# Altium PCB IMTM-Right-PCB01.PcbDoc
Units mm, origin at the board's own origin, x right, y up, seen from the top; angles counter-clockwise.
Board outline 27 x 21 mm, 3 copper layers (Top Layer, GND Layer, Bottom Layer), stack 1.49 mm thick; 9 components, 17 nets, 44 pads, 13 vias.
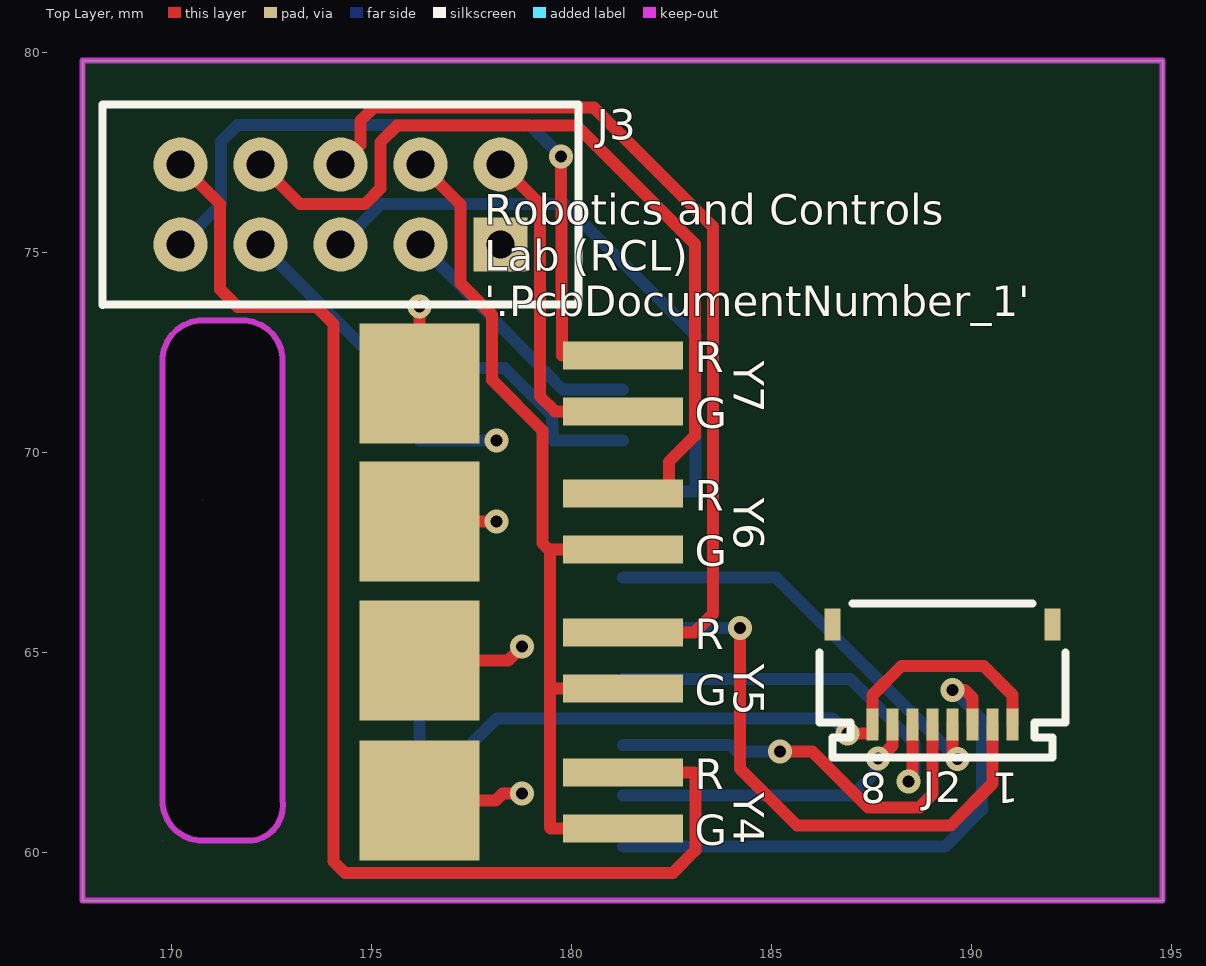
[diagram p0: Top Layer view]
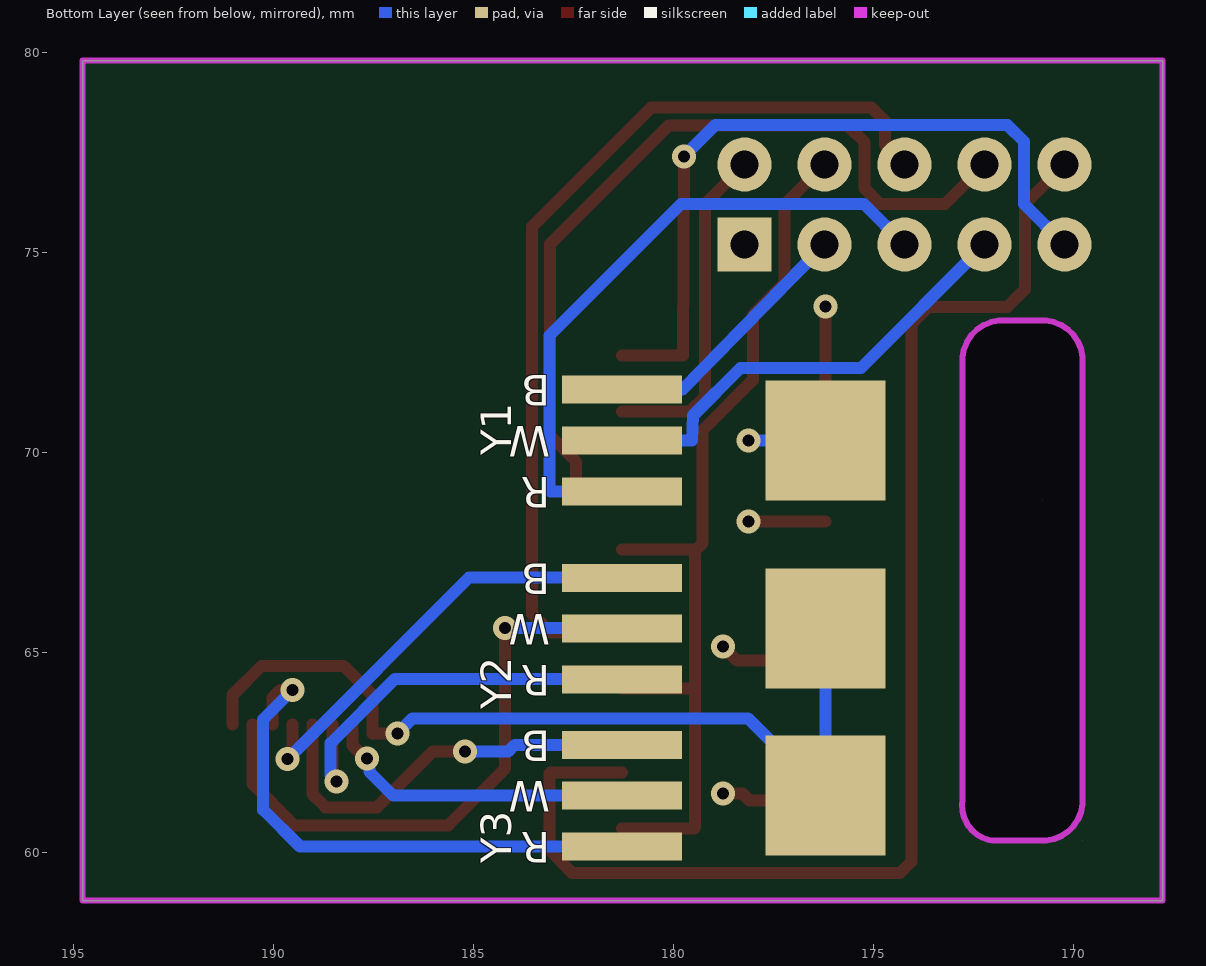
[diagram p1: Bottom Layer view, seen from below]
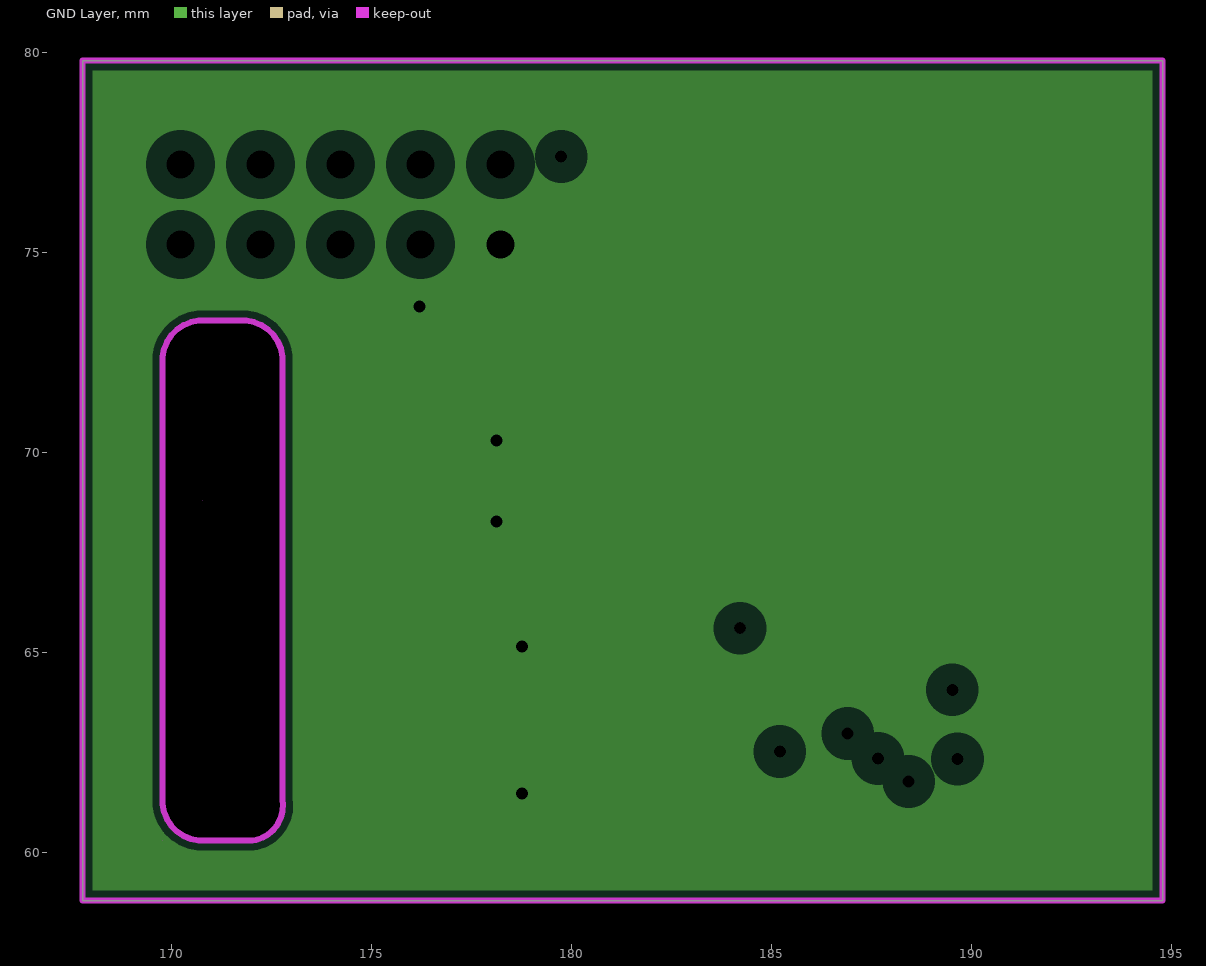
[diagram p2: GND Layer, clearances drawn from the general rule]

## Layer stack, top to bottom
Top Solder: solder mask 0.0254, SM-001, Dk 4
Top Layer: signal copper 0.035
Dielectric 1: prepreg 0.185, PP-7628, Dk 0
GND Layer: plane copper 0.035, net GND
Dielectric 2: core 1.2, Dk 0
Bottom Layer: signal copper 0.035
Bottom Solder: solder mask 0.0254, SM-001, Dk 4

## Board outline
167.767,58.801 194.767,58.801 194.767,79.801 191.767,79.801 167.767,79.801
cut-out: 169.767,61.301 169.767,72.301 cw(c170.767,72.301) 170.767,73.301 171.767,73.301 cw(c171.767,72.301) 172.767,72.301 172.767,61.301 cw(c171.892,61.176) 172.017,60.301 170.767,60.301 cw(c170.766,61.3)
cut-out: 170.767,68.801
cut-out: 169.767,71.801
cut-out: 169.767,60.301

## Design rules (kind name [scope] priority, off if disabled: settings)
Clearance [All] p1: gap=0.15 ignorepadtopadclearanceinfootprint=FALSE
ComponentClearance [All] p1: gap=0.1 collisioncheckmode=3 verticalgap=0.254 showdistances=FALSE
FabricationTestPointUsage TestPointUsage [All] p1: valid=0 allowmultiple=FALSE
FabricationTestpoint Testpoint [All] p1: side=3 testpointundercomponent=TRUE minsize=1.016 maxsize=2.54 preferedsize=1.524 minholesize=0 maxholesize=1.016 preferedholesize=0.813 testpointgrid=0.025 allowsidetop=TRUE allowsidebottom=TRUE usegrid=TRUE gridtolerance=0
PlaneClearance [All] p1: clearance=0.508
PlaneConnect [All] p1: planeconnectstyle=Relief reliefexpansion=0.254 reliefentries=4 reliefconductorwidth=0.254 reliefairgap=0.254
PolygonConnect [All] p1: connectstyle=Relief reliefconductorwidth=0.254 reliefentries=4 polygonreliefangle="90 Angle" airgapwidth=0.254
RoutingVias [All] p1: holewidth=0.6 width=1 viastyle="Through Hole" minholewidth=0.6 minwidth=1 maxholewidth=0.6 maxwidth=1
SilkToSolderMaskClearance SilkscreenOverComponentPads [IsPad] p1: minsilkscreentomaskgap=0.254 clearancetoexposedcopper=TRUE
SolderMaskExpansion [All] p1: expansion=0.102
UnRoutedNet [All] p1: checkbadconnections=TRUE
Width [All] p1: maxlimit=0.512 minlimit=0.127 preferedwidth=0.254
23 further rules are at their usual default settings.

## Components (designator, comment, footprint, x,y, rotation, side; value= is the part's Value field where it differs from the comment)
J2 "687108182122" PCBComponent_1 189.267,64.301 r180 top
J3 "B10B-PHDSS(LF)(SN)(P)" B10B-PHDSS(LF)(SN)(P) 178.217,75.201 r0 top
Y1 "4W_BRKOUT" 4W_BRKOUT 180.767,70.301 r90 bottom
Y2 "4W_BRKOUT" 4W_BRKOUT 180.767,65.598 r90 bottom
Y3 "4W_BRKOUT" 4W_BRKOUT 180.767,61.421 r90 bottom
Y4 "3W_BRKOUT" 3W_BRKOUT 180.767,61.301 r270 top
Y5 "3W_BRKOUT" 3W_BRKOUT 180.767,64.801 r270 top
Y6 "3W_BRKOUT" 3W_BRKOUT 180.767,68.272 r270 top
Y7 "3W_BRKOUT" 3W_BRKOUT 180.767,71.729 r270 top

## Footprints (in the part's own frame and the unit in brackets; to place one, negate y for a bottom-side part, rotate by r counter-clockwise, add the part's x,y. Pads: shape width x height; smd on the part's side, far side on the other; paste and mask are expansions set on the pad)
3W_BRKOUT [mm]
  rect 3x3 smd: 1(0,-4.572)
  rect 0.7x3 smd: 2(-0.7,0.508) 3(0.7,0.508)
4W_BRKOUT [mm]
  rect 3x3 smd: 1(0,-4.572)
  rect 0.7x3 smd: 2(-1.27,0.508) 3(0,0.508) 4(1.27,0.508)
B10B-PHDSS(LF)(SN)(P) [mm]
  rect 1.35x1.35 / inner round 1.35 / far side rect 1.35x1.35 hole 0.7: 1(0,0)
  round 1.35 hole 0.7: 2(0,2) 3(-2,0) 4(-2,2) 5(-4,0) 6(-4,2) 7(-6,0) 8(-6,2) 9(-8,0) 10(-8,2)
  silkscreen extent -9.95,-1.52 1.95,3.5, body extent -10.03,-1.6 2.03,3.6, height 6.5
PCBComponent_1 [mm]
  rect 0.3x0.8 smd: 1(-1.75,1.1) 2(-1.25,1.1) 3(-0.75,1.1) 4(-0.25,1.1) 5(0.25,1.1) 6(0.75,1.1) 7(1.25,1.1) 8(1.75,1.1)
  rect 0.4x0.8 smd: MP1(-2.75,-1.4) MP2(2.75,-1.4)
  silkscreen extent -3.08,-1.92 3.07,1.92, body extent -3,-1.85 3,1.85, height 0.98

## Part data
J2: "CONN FFC FPC 8POS 0.5MM R/A", Current Rating=500mA, Flammability Rating="UL94 V-0", Manufacturer="Wurth Electronics", Max Operating Temperature=105°C, Min Operating Temperature=-40°C, Supplier Part Number 1=732-10016-1-ND, Voltage Rating=50V, Actuator Material=Nylon,Polyamide, Category="FFC / FPC", ComponentLink1Description=https://media.digikey.com/pdf/Data%20Sheets/Wurth%20Electronics%20PDFs/WR-FPC_FFC_Flyer.pdf?src-supplier=Digi-Key, ComponentLink1URL=https://media.digikey.com/pdf/Data%20Sheets/Wurth%20Electronics%20PDFs/WR-FPC_FFC_Flyer.pdf?src-supplier=Digi-Key, Contact Material=Bronze, Contact Plating=Tin, Housing Material=Polymer, Manufacturer Part Number=687108182122, Mount="Surface Mount", Number of Positions=8, Packaging="Tape and Reel", Pitch=0.02inch, Pricing 1="1=1.41000, 100=1.17880, 500=1.03730, 1000=0.84870 (USD)", RoHS=Yes, Stock 1=1416, Supplier 1=Digi-Key, Termination=Solder
J3: "JST (JAPAN SOLDERLESS TERMINALS) - B10B-PHDSS(LF)(SN)(P) - CONNECTOR, HEADER, 10POS, 2MM, 2ROW", Color=Natural, Current Rating=3A, Manufacturer=JST, Package Quantity=500, Supplier Part Number 1=6881379, Voltage Rating=250V, Category=Connectors, ComponentLink1Description=https://datasheet.ciiva.com/11754/0900766b80ddecc5-11754210.pdf?src-supplier=RSComponents, ComponentLink1URL=https://datasheet.ciiva.com/11754/0900766b80ddecc5-11754210.pdf?src-supplier=RSComponents, ComponentLink2Description=https://datasheet.ciiva.com/712/ephd-712656.pdf?src-supplier=Digi-Key, ComponentLink2URL=https://datasheet.ciiva.com/712/ephd-712656.pdf?src-supplier=Digi-Key, ComponentLink3Description=https://datasheet.ciiva.com/46409/1699380-46409223.pdf?src-supplier=Element14, ComponentLink3URL=https://datasheet.ciiva.com/46409/1699380-46409223.pdf?src-supplier=Element14, Connector Type="Male Pin", Contact Material="Copper Alloy,Copper", Contact Plating=Tin, Gender=Male, Manufacturer Part Number=B10B-PHDSS(LF)(SN)(P), Mount="Through Hole", Number of Contacts=10, Number of Positions=10, Number of Rows=2, Orientation=Straight, Packaging=Bulk, Pitch=0.079inch, Pricing 1="5=0.54600, 125=0.40900, 500=0.37700, 2500=0.36900, 5000=0.36200 (USD)", REACH SVHC=Unknown, RoHS=Yes, Row Spacing=0.079inch, Stock 1=35, Supplier 1=RSComponents, Termination=Solder

## Via types
v1: diameter 0.6, hole 0.3, Top Layer to Bottom Layer, 13 vias

## Nets (pads, with @x,y where several pads share a name; then routed paths per layer and width w, separated by ;. In a path a pad name is that pad's centre, name@x,y a point inside that pad or via, vN(x,y) a via of type N, cw(c..) or ccw(c..) an arc to the next point about the centre after c; other vN are vias at no path point)
ENC_CHA: J3.6 Y5.2 | length 23.6
  Top Layer w0.3: J3.6 174.71,77.694 174.71,78.291 175.046,78.626 180.551,78.626 183.525,75.651 183.525,65.964 183.062,65.501 Y5.2
ENC_CHB: J3.10 Y4.2 | length 33.3
  Top Layer w0.3: J3.10 171.21,76.208 171.21,74.077 171.645,73.643 173.613,73.643 174.045,73.211 174.045,59.774 174.324,59.495 182.528,59.495 183.087,60.054 183.087,61.976 183.062,62.001 Y4.2
ENC_GND: J3.4 Y4.3 Y5.3 Y6.3 | length 23.4
  Top Layer w0.3: J3.4 177.22,76.198 177.22,74.227 178.007,73.44 178.007,71.814 179.265,70.557 179.265,67.737 179.455,67.546 ; Y4.3 179.48,60.601 179.455,60.626 179.455,64.076 179.48,64.101 ; Y5.3 179.48,64.101 ; Y6.3 179.48,67.572 179.455,67.546 ; 179.455,67.546 179.455,64.126 179.48,64.101
ENC_VCC: J3.8 Y6.2 | length 21.7
  Top Layer w0.3: J3.8 173.21,76.208 174.82,76.208 175.213,76.602 175.213,77.758 175.632,78.176 180.112,78.176 183.075,75.213 183.075,70.417 182.427,69.769 182.427,68.972 Y6.2
GND: J3.1 Y1.1 Y4.1 Y5.1 Y6.1 Y7.1 | length 11.1
  Top Layer w0.3: Y4.1 178.094,61.301 178.269,61.476 v1(178.756,61.476) ; Y5.1 178.41,64.801 v1(178.756,65.146) ; Y6.1 v1(178.122,68.272) ; Y7.1 v1(176.195,73.656)
  Bottom Layer w0.3: Y1.1 v1(178.122,70.301)
HLE1_GND: J2.5 Y3.4 | length 10.3
  Top Layer w0.3: v1(185.2,62.525) 186.011,62.525 187.405,61.13 188.688,61.13 189.021,61.463 189.021,62.961 189.017,62.965 J2.5
  Bottom Layer w0.3: Y3.4 183.959,62.691 184.125,62.525 v1(185.2,62.525)
HLE1_VCC: J2.3 Y3.2 | length 13.9
  Top Layer w0.3: v1(189.513,64.067) 189.818,64.067 190.017,63.868 J2.3
  Bottom Layer w0.3: Y3.2 189.331,60.151 190.25,61.07 190.25,63.33 v1(189.513,64.067)
HLE1_VOUT: J2.7 Y3.3 | length 7.9
  Top Layer w0.3: v1(187.654,62.351) 187.691,62.351 188.017,62.677 J2.7
  Bottom Layer w0.3: Y3.3 186.994,61.421 187.596,62.023 187.596,62.294 v1(187.654,62.351)
HLE2_GND: J2.4 Y2.4 | length 11.2
  Top Layer w0.3: J2.4 189.517,62.463 v1(189.64,62.34)
  Bottom Layer w0.3: Y2.4@181.275,66.881 185.099,66.881 v1(189.64,62.34)
HLE2_VCC: J2.6 Y2.2 | length 10.4
  Top Layer w0.3: v1(188.421,61.778) 188.421,61.859 188.517,61.955 J2.6
  Bottom Layer w0.3: Y2.2@181.275,64.341 186.956,64.341 188.564,62.733 188.564,61.921 v1(188.421,61.778)
HLE2_VOUT: J2.2 Y2.3 | length 15.3
  Top Layer w0.3: v1(184.205,65.611) 184.205,62.098 185.623,60.68 189.471,60.68 190.517,61.726 J2.2
  Bottom Layer w0.3: Y2.3@181.275,65.611 v1(184.205,65.611)
HLE_GNDPLN: J2.1 J2.8 Y2.1 Y3.1 | length 22.3
  Top Layer w0.3: v1(186.894,62.978) 187.517,62.978 J2.8 187.517,63.94 188.244,64.667 190.29,64.667 191.017,63.94 J2.1
  Bottom Layer w0.3: Y2.1@176.195,65.611 Y3.1 178.13,63.356 186.516,63.356 v1(186.894,62.978)
MTR+: J3.9 Y7.2 | length 18.5
  Top Layer w0.3: v1(179.734,77.402) 179.76,72.429 Y7.2
  Bottom Layer w0.3: J3.9 171.225,76.209 171.225,77.77 171.645,78.189 178.947,78.189 v1(179.734,77.402)
MTR-: J3.2 Y7.3 | length 8.4
  Top Layer w0.3: J3.2 179.201,76.217 179.201,71.41 179.582,71.029 Y7.3
POT_GND: J3.3 Y1.4 | length 6.6
  Bottom Layer w0.3: J3.3 179.773,71.571 Y1.4
POT_REF: J3.5 Y1.2 | length 16.3
  Bottom Layer w0.3: J3.5 175.224,76.208 179.811,76.208 183.087,72.932 183.087,69.056 183.062,69.031 Y1.2
POT_WIPER: J3.7 Y1.3 | length 11.4
  Bottom Layer w0.3: J3.7 175.299,72.119 178.312,72.119 179.506,70.925 179.531,70.301 Y1.3
pads on no net: J2.MP1 J2.MP2

## Polygon pours and split planes (outlines as drawn)
GND on GND Layer (split plane): 194.511,59.057 168.023,59.057 168.023,79.545 194.511,79.545

## Keep-outs
Keep-Out Layer:
  lines w0.15: 169.767,61.301 169.767,61.202 169.805,61.009 169.881,60.827 169.99,60.663 170.129,60.524 170.293,60.415 170.475,60.339 170.668,60.301 170.767,60.301 172.017,60.301 ; 169.767,61.301 169.767,61.301 ; 169.767,61.301 169.767,72.301 169.767,72.399 169.805,72.593 169.881,72.775 169.99,72.938 170.13,73.078 170.293,73.187 170.475,73.263 170.668,73.301 170.767,73.301 ; 170.767,73.301 171.767,73.301 171.865,73.301 172.059,73.263 172.241,73.187 172.404,73.078 172.544,72.938 172.653,72.775 172.729,72.593 172.767,72.399 172.767,72.301 ; 170.767,73.301 170.767,73.301 ; 172.017,60.301 172.103,60.313 172.267,60.371 172.417,60.46 172.547,60.576 172.651,60.715 172.727,60.872 172.77,61.041 172.779,61.215 172.767,61.301 172.767,72.301 ; 172.017,60.301 172.017,60.301 ; 172.767,72.301 172.767,72.301 ; 167.767,58.801 167.767,79.801 194.767,79.801 194.767,58.801 167.767,58.801

## Silkscreen, mask and mechanical layers (free items; w line width, h text height)
Top Overlay:
  text "Robotics and Controls / Lab (RCL) / '.PcbDocumentNumber_1'" at 177.813,73.406 h0.76
Titleblock:
  lines w0.127: 0,48.26 5.08,48.26 ; 0,96.52 5.08,96.52 ; 0,144.78 5.08,144.78 ; 73.025,0 73.025,5.08 ; 73.025,187.96 73.025,193.04 ; 146.05,0 146.05,5.08 ; 146.05,187.96 146.05,193.04 ; 172.72,12.7 287.02,12.7 ; 172.72,20.32 287.02,20.32 ; 172.72,27.94 210.82,27.94 ; 210.82,5.08 210.82,20.32 210.82,35.56 ; 219.075,0 219.075,5.08 ; 219.075,187.96 219.075,193.04 ; 264.16,5.08 264.16,20.32 ; 287.02,48.26 292.1,48.26 ; 287.02,96.52 292.1,96.52 ; 287.02,144.78 292.1,144.78 ; 172.72,5.08 287.02,5.08 ; 172.72,5.08 137.16,5.08 137.16,35.56 172.72,35.56 ; 172.72,5.08 172.72,35.56 ; 172.72,35.56 210.82,35.56 ; 210.82,35.56 287.02,35.56 287.02,5.08 ; 287.02,5.08 5.08,5.08 5.08,187.96 287.02,187.96 287.02,5.08 ; 0,0 292.1,0 292.1,193.04 0,193.04 0,0
  text "1" at 36.246,189.611 h1.78
  text "2" at 108.89,189.611 h1.78
  text "3" at 182.042,189.611 h1.78
  text "4" at 254.94,189.611 h1.78
  text "A" at 1.905,166.599 h1.78
  text "A" at 288.925,166.599 h1.78
  text "B" at 1.905,118.542 h1.78
  text "B" at 288.925,118.542 h1.78
  text "C" at 1.905,70.028 h1.78
  text "C" at 288.925,70.028 h1.78
  text "ENGINEER:" at 173.99,33.02 h1.14
  text "TITLE:" at 212.09,33.02 h1.14
  text "Tolerances unless otherwise specified:" at 94.531,32.35 h1.52
  text "Robotics and Controls" at 139.604,31.046 h3.18
  text ".ProjectTitle" at 219.885,29.554 h6.35
  text ".X +/- 0.20" at 99.865,29.175 h1.52
  text "'.DrawnBy'" at 174.876,29.121 h3.17
  text "'.DrawnDate'" at 194.126,29.118 h3.17
  text "Laboratory (RCL)" at 139.604,27.796 h3.18
  text ".XX +/- 0.10" at 98.468,26.635 h1.52
  text "PCB DESIGNER:" at 173.99,25.527 h1.14
  text "'.DocumentTitle'" at 219.885,25.46 h3.81
  text ".XXX +/- 0.05" at 97.071,24.095 h1.52
  text "D" at 1.905,22.022 h1.78
  text "D" at 288.925,22.022 h1.78
  text "'.DrawnBy'" at 174.712,21.754 h3.17
  text "'.DrawnDate'" at 193.962,21.751 h3.17
  text "DATE:" at 173.99,17.78 h1.14
  text "PART NO.:" at 212.09,17.78 h1.14
  text "REV:" at 265.43,17.78 h1.14
  text "3090 Kaiser Building" at 140.97,15.24 h3.17
  text "'.PcbDocumentNumber_1'" at 222.876,14.621 h3.17
  text ".PRINT_DATE" at 175.876,14.371 h3.17
  text "'.Rev'" at 265.498,13.979 h3.17
  text "2332 Main Mall" at 140.97,12.7 h3.17
  text "Vancouver, BC" at 140.97,10.16 h3.17
  text "FILE NAME:" at 173.99,10.16 h1.14
  text "DWG NO:" at 212.09,10.16 h1.14
  text "SCALE:" at 265.43,10.16 h1.14
  text "V6J 1R6" at 140.97,7.62 h3.17
  text ".PCB_FILE_NAME_NO_PATH" at 173.626,6.871 h3.17
  text "'.PcbDocumentNumber_1'" at 222.376,6.871 h3.17
  text "1:1" at 265.582,6.037 h3.17
  text "1" at 36.246,1.651 h1.78
  text "2" at 108.89,1.651 h1.78
  text "3" at 182.042,1.651 h1.78
  text "4" at 254.94,1.651 h1.78
Drill Drawing:
  lines w0.127: 190.762,137.545 248.547,137.545 248.547,140.339 190.762,140.339 190.762,137.545 ; 190.887,157.969 190.887,160.763 248.672,160.763 248.672,157.969 190.887,157.969 ; 195.967,144.507 195.967,147.301 243.592,147.301 243.592,144.507 195.967,144.507 ; 195.967,151.365 243.592,151.365 243.592,154.159 195.967,154.159 195.967,151.365
  lines w0.254: 218.639,132.981 248.484,132.981 ; 190.762,140.847 248.547,140.847 248.547,143.895 190.762,143.895 190.762,140.847 ; 190.887,147.809 248.672,147.809 248.672,150.857 190.887,150.857 190.887,147.809 ; 190.887,154.667 190.887,157.461 248.672,157.461 248.672,154.667 190.887,154.667
  text "NOTES:" at 11.421,183.176 h1
  text "1." at 11.421,180.176 h1
  text "Performance and qualification per latest revisions of  IPC-6011 and 6012:  Class 2." at 16.231,180.176 h1
  text "2." at 11.421,177.176 h1
  text "Acceptance per latest revisions of  IPC-A-600 and IPC-A-610:  Class 2." at 16.231,177.176 h1
  text "3." at 11.421,174.176 h1
  text "Finished assembly to comply with latest amendments to EU Directive 2011/65/EU (RoHS2)." at 16.231,174.176 h1
  text "4." at 11.421,171.176 h1
  text "Flame Class:" at 16.231,171.176 h1
  text "UL 94V-0" at 29.967,171.176 h1
  text "5." at 11.421,168.176 h1
  text "Flammability rating and manufacturer's UL file number to be marked on bottom silkscreen." at 16.231,168.176 h1
  text "6." at 11.421,165.176 h1
  text "Dimensions are in mm unless specified otherwise.  Tolerances are as indicated on Dimensions layer unless otherwise noted." at 16.231,165.176 h1
  text "7." at 11.421,162.176 h1
  text "All dimensional limits apply after plating or processing." at 15.967,162.176 h1
  text "8." at 11.421,159.176 h1
  text "Refer to drill table for hole size tolerances." at 15.967,159.176 h1
  text "SOLDERMASK" at 197.237,158.731 h1.27
  text "0.025 mm" at 233.686,158.731 h1.27
  text "9." at 11.421,156.176 h1
  text "Hole / slot plating to be 0.001\" minimum average and 0.0008\" absolute minimum." at 15.967,156.176 h1
  text "L01 / TOP" at 191.903,155.429 h1.27
  text "1.0 Oz Cu" at 206.127,155.429 h1.27
  text "0.035 mm" at 233.686,155.429 h1.27
  text "Hole / slot diameters are specified after plating." at 15.967,153.176 h1
  text "PREPREG" at 197.237,152.127 h1.27
  text "PP7628" at 206.127,152.127 h1.27
  text "0.185 mm" at 233.686,152.127 h1.27
  text "10." at 11.421,150.176 h1
  text "Board thickness and tolerance are as indicated on Layer Stack detail." at 15.967,150.176 h1
  text "L02 / PLN" at 191.903,148.571 h1.27
  text "1.0 Oz Cu" at 206.127,148.571 h1.27
  text "0.035 mm" at 233.686,148.571 h1.27
  text "11." at 11.421,147.176 h1
  text "Remove all sharp edges and burrs 0.003\" maximum." at 15.967,147.176 h1
  text "CORE" at 197.237,145.269 h1.27
  text "1.200 mm" at 233.686,145.269 h1.27
  text "12." at 11.421,144.176 h1
  text "Base Material:" at 15.967,144.176 h1
  text "As noted in layer stack." at 31.967,144.176 h1
  text "L03 / BOT" at 191.778,141.609 h1.27
  text "1.0 Oz Cu" at 206.002,141.609 h1.27
  text "0.035 mm" at 233.561,141.609 h1.27
  text "13." at 11.421,141.176 h1
  text "Soldermask:" at 15.967,141.176 h1
  text "Liquid Photo Imageable in accordance with IPC-SM-840 (latest revision)." at 31.967,141.176 h1
  text "FINISHED THICKNESS" at 183.775,140.583 h1.27 r90
  text "1.6 mm +/- 0.1mm" at 185.807,140.042 h1.27 r90
  text "SOLDERMASK" at 197.112,138.307 h1.27
  text "0.025 mm" at 233.561,138.307 h1.27
  text "Finish to be green and glossy.  Registration to be within +/- 0.003 of respective" at 31.967,138.176 h1
  text "outer circuit layers." at 31.967,135.176 h1
  text "LAYER STACK DETAIL" at 218.549,133.997 h2.03
  text "14." at 11.421,132.176 h1
  text "Silkscreen:" at 15.967,132.176 h1
  text "White non-conductive ink (top and bottom).  No ink to appear on exposed copper." at 31.967,132.176 h1
  text "NOT TO SCALE" at 235.333,131.076 h1.27
  text "15." at 11.421,129.255 h1
  text "Finish:" at 15.967,129.255 h1
  text "Electroless Nickel Immersion Gold (ENIG).  Finish both sides with 150 micro inches" at 31.967,129.255 h1
  text "minimum electroless Nickel (Ni) followed by minimum 2 microinches immersion Gold (Au)." at 31.967,126.176 h1
  text "16." at 11.421,123.176 h1
  text "Electrical Test:" at 15.967,123.176 h1
  text "Perform 100% continuity and isolation testing per current IPC test methods." at 31.967,123.176 h1
  text "17." at 11.421,120.176 h1
  text "Controlled impedance is not required." at 15.967,120.176 h1
  text "18." at 11.421,117.176 h1
  text "Coordinate panelization with contract manufacturer." at 15.967,117.176 h1

## Dimensions
167.767,79.801 to 172.767,66.801 on Mech Drawing
167.767,80.055 to 169.767,66.801 on Mech Drawing
167.767,79.801 to 194.767,79.801 on Mech Drawing
167.767,79.801 to 171.392,60.301 on Mech Drawing
167.513,79.801 to 171.267,73.301 on Mech Drawing
167.767,79.801 to 167.767,58.801 on Mech Drawing
190.887,160.763 to 190.762,137.545 on Drill Drawing

## Text inside footprints (layer, text, board x,y; h text height)
J2: Top Overlay "1" at 191.167,62.001 h0.76 r180; Top Overlay "8" at 187.867,62.001 h0.76 r180
Y1: Bottom Overlay "B" at 183.078,71.927 h0.76 r180; Bottom Overlay "R" at 183.078,69.387 h0.76 r180; Bottom Overlay "W" at 183.078,70.657 h0.76 r180
Y2: Bottom Overlay "B" at 183.078,67.224 h0.76 r180; Bottom Overlay "R" at 183.078,64.684 h0.76 r180; Bottom Overlay "W" at 183.078,65.954 h0.76 r180
Y3: Bottom Overlay "B" at 183.078,63.047 h0.76 r180; Bottom Overlay "R" at 183.078,60.507 h0.76 r180; Bottom Overlay "W" at 183.078,61.777 h0.76 r180
Y4: Top Overlay "R" at 183.078,61.58 h0.76; Top Overlay "G" at 183.078,60.183 h0.76
Y5: Top Overlay "R" at 183.078,65.08 h0.76; Top Overlay "G" at 183.078,63.683 h0.76
Y6: Top Overlay "R" at 183.078,68.551 h0.76; Top Overlay "G" at 183.078,67.154 h0.76
Y7: Top Overlay "R" at 183.078,72.008 h0.76; Top Overlay "G" at 183.078,70.611 h0.76